# Altium PCB pci_104.PcbDoc (part 1 of 4)
Units mil, origin at the board's own origin, x right, y up, seen from the top; angles counter-clockwise.
Board outline 3775.2 x 3550 mil, 4 copper layers (Top Layer - RF, MidLayer2 - GND, MidLayer3 - POWER, Bottom Layer - Digital), stack 61.756 mil thick; 251 components, 242 nets, 872 pads, 382 vias.
Unrouted connection lines stored in the file: 291.
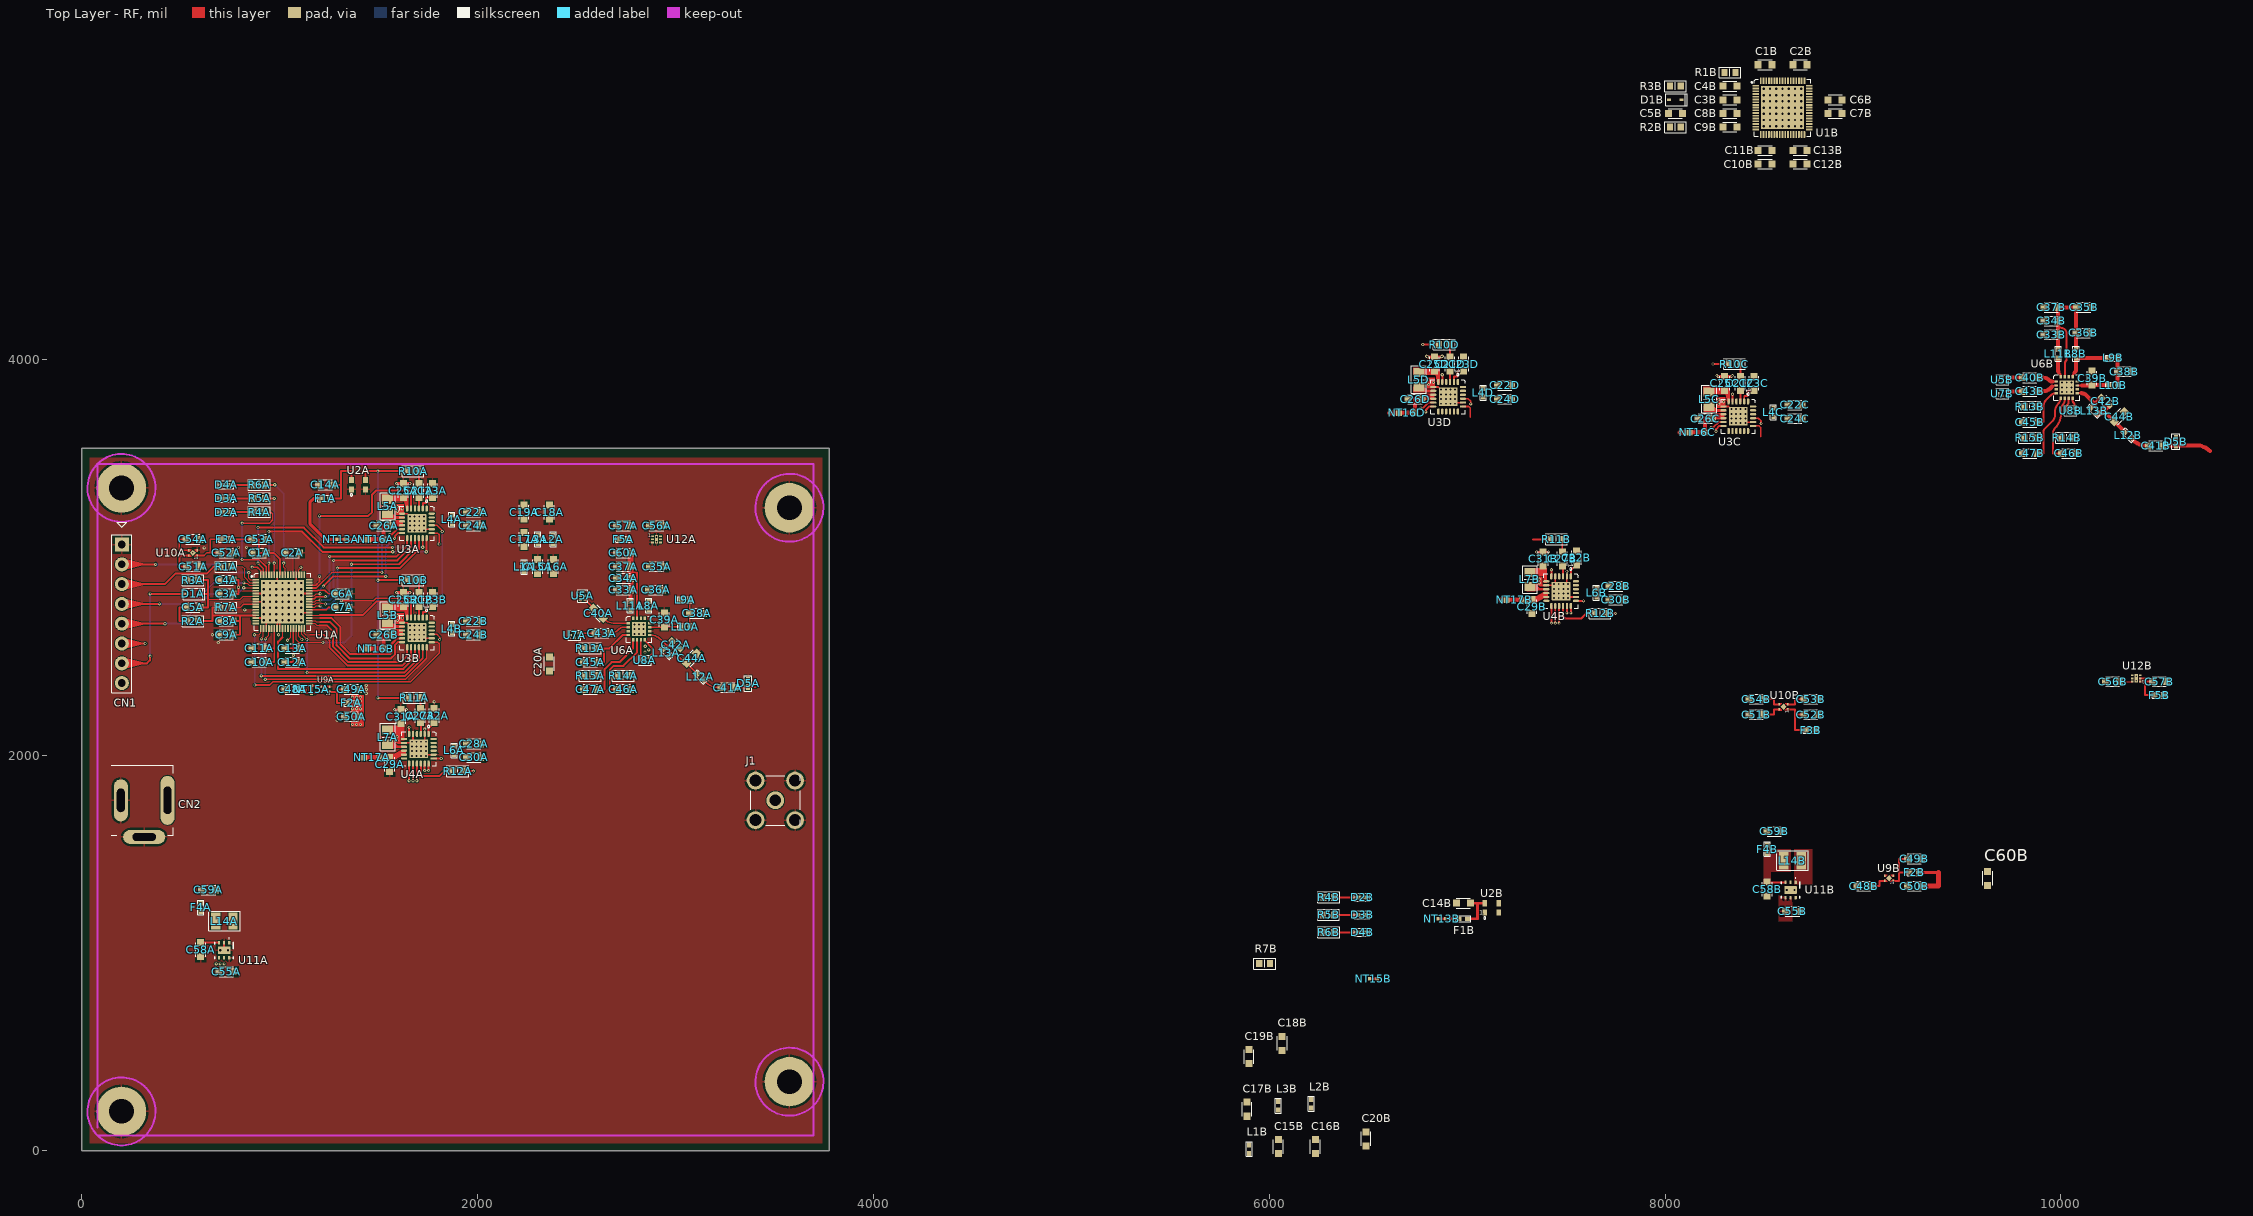
[diagram p0: Top Layer - RF view]
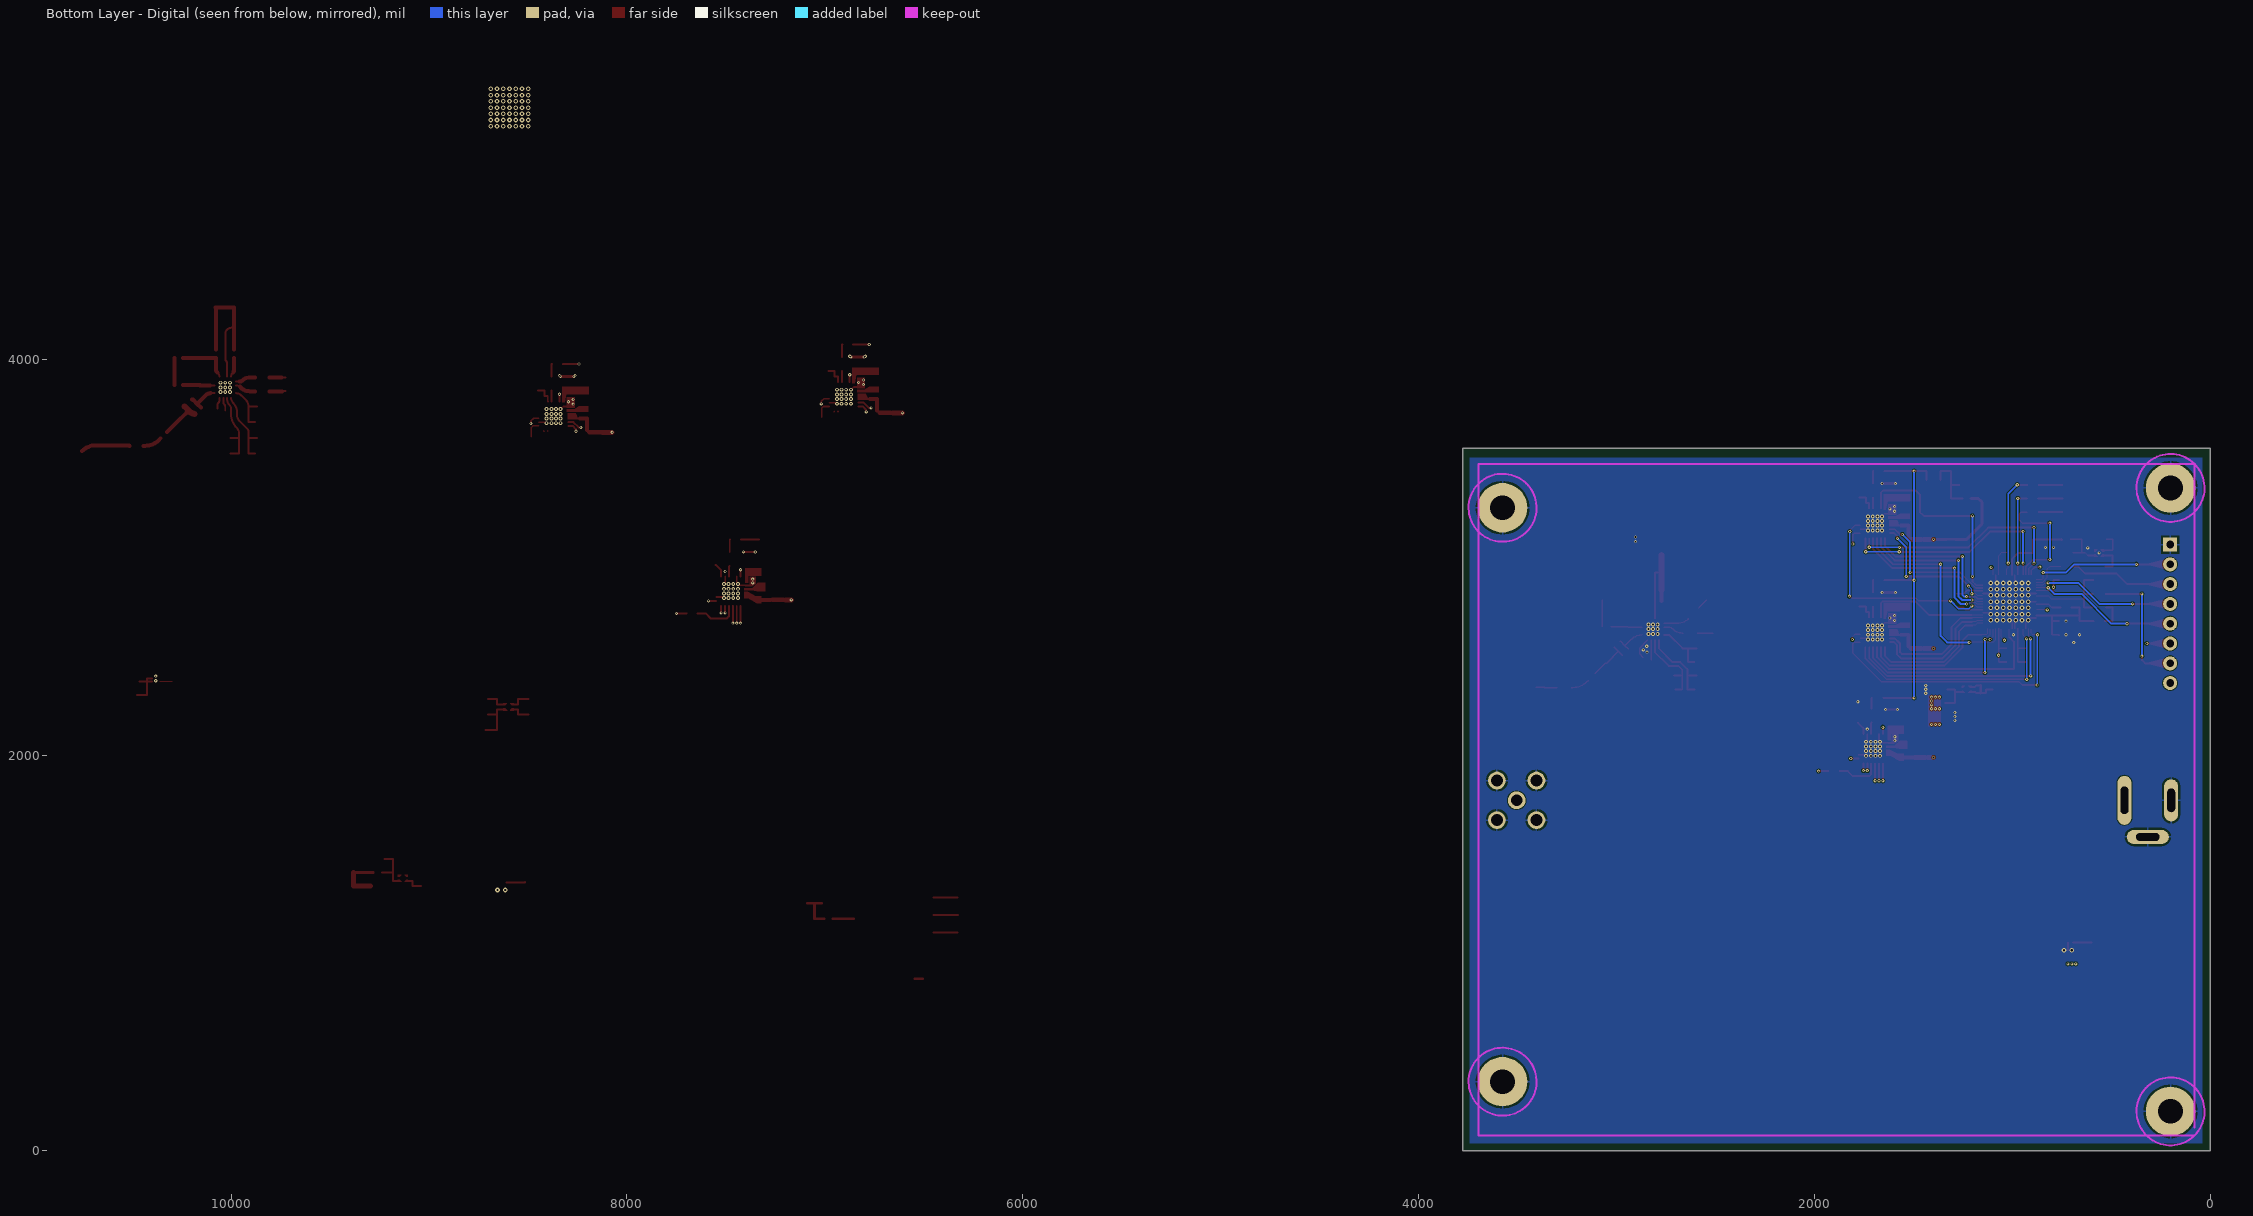
[diagram p1: Bottom Layer - Digital view, seen from below]
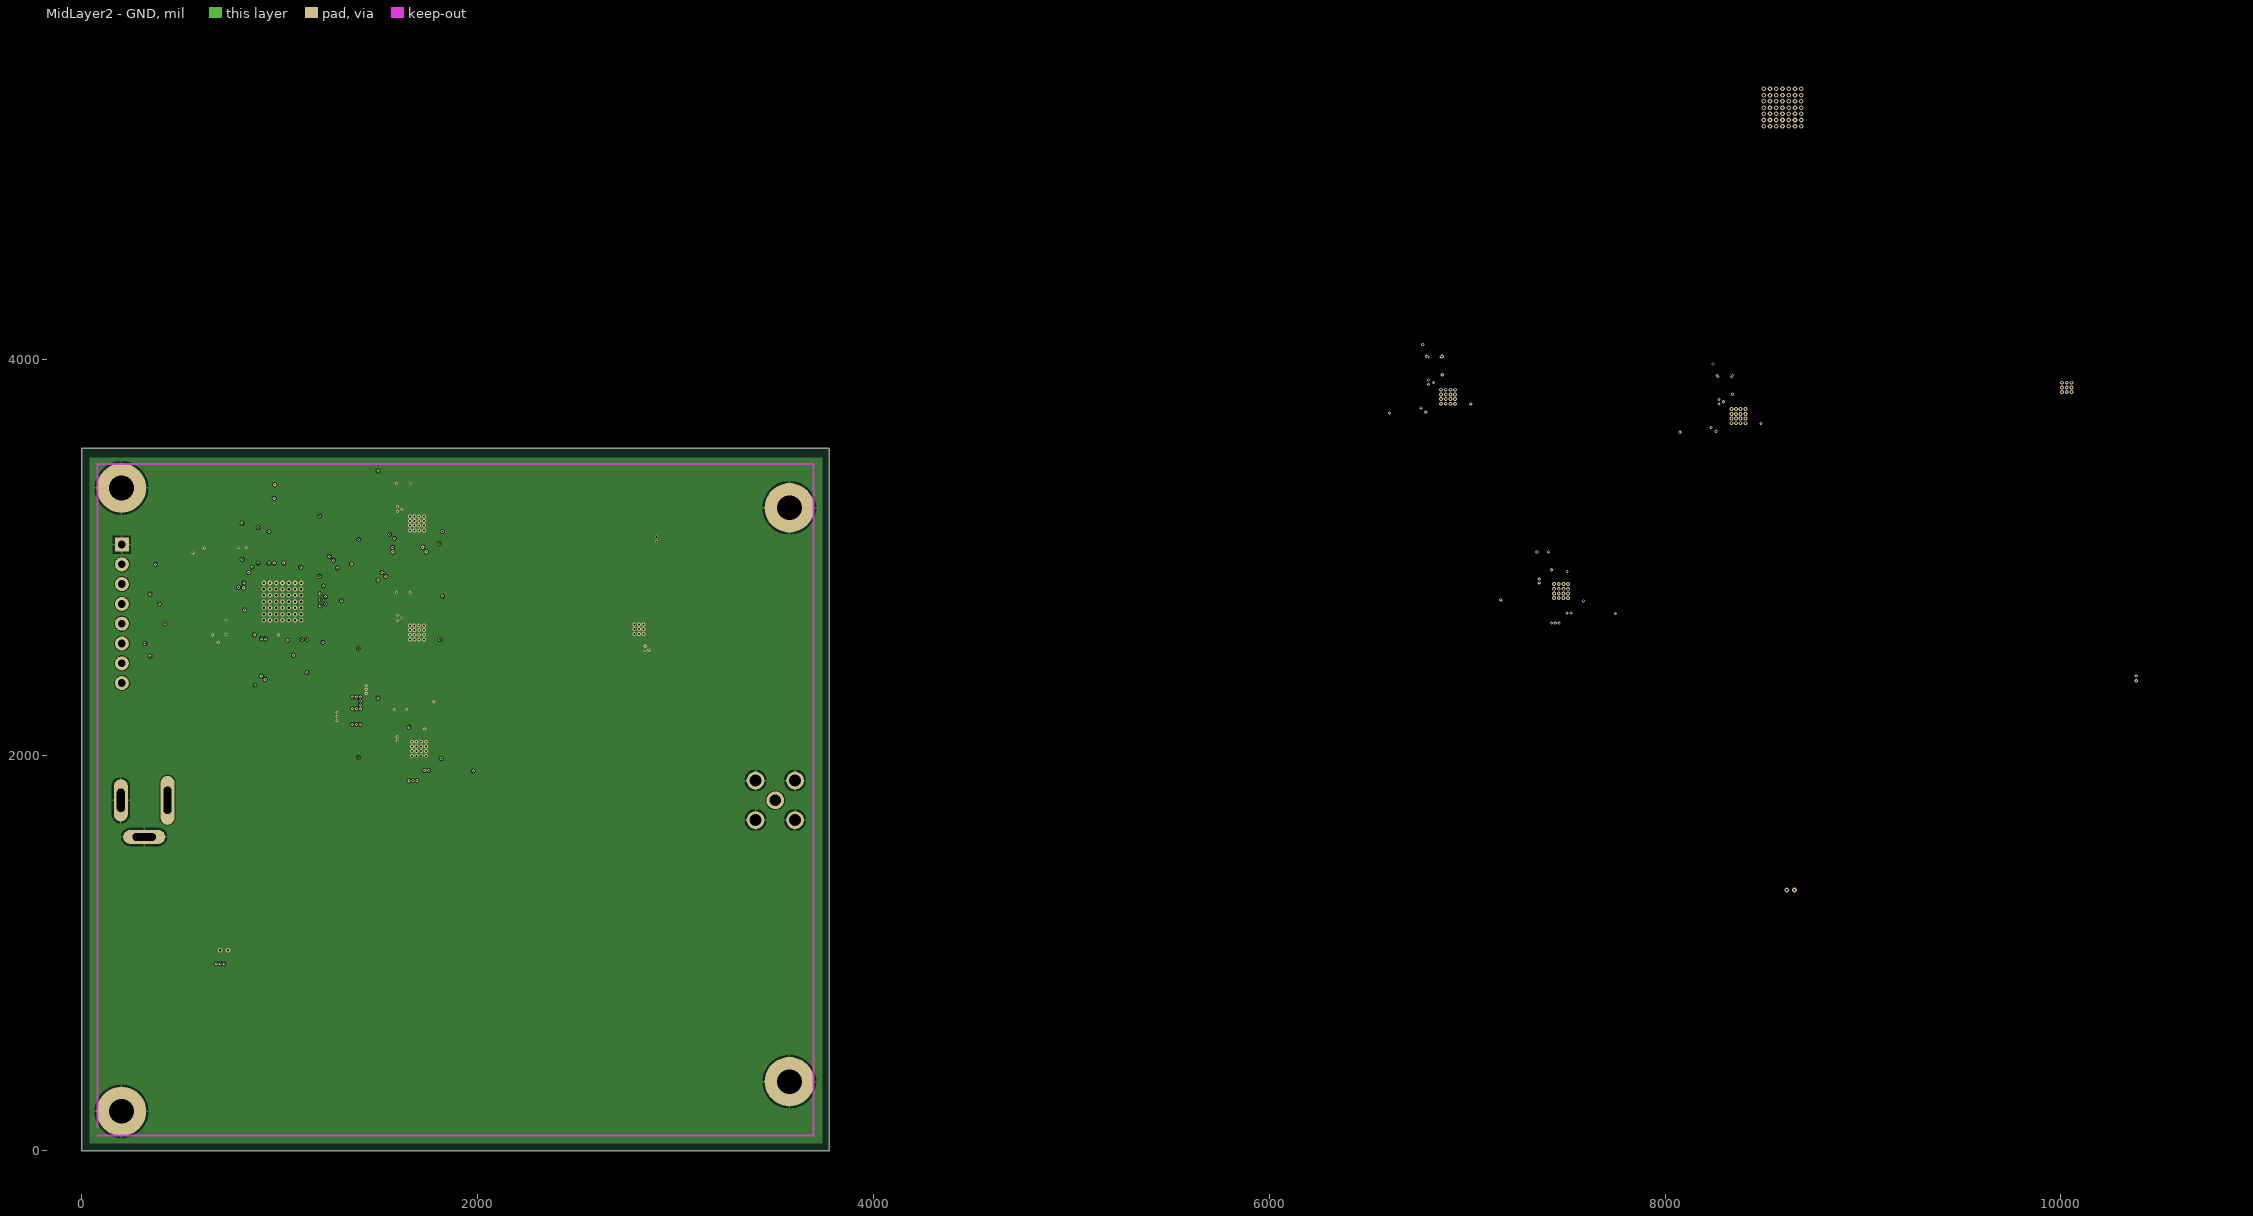
[diagram p2: MidLayer2 - GND]
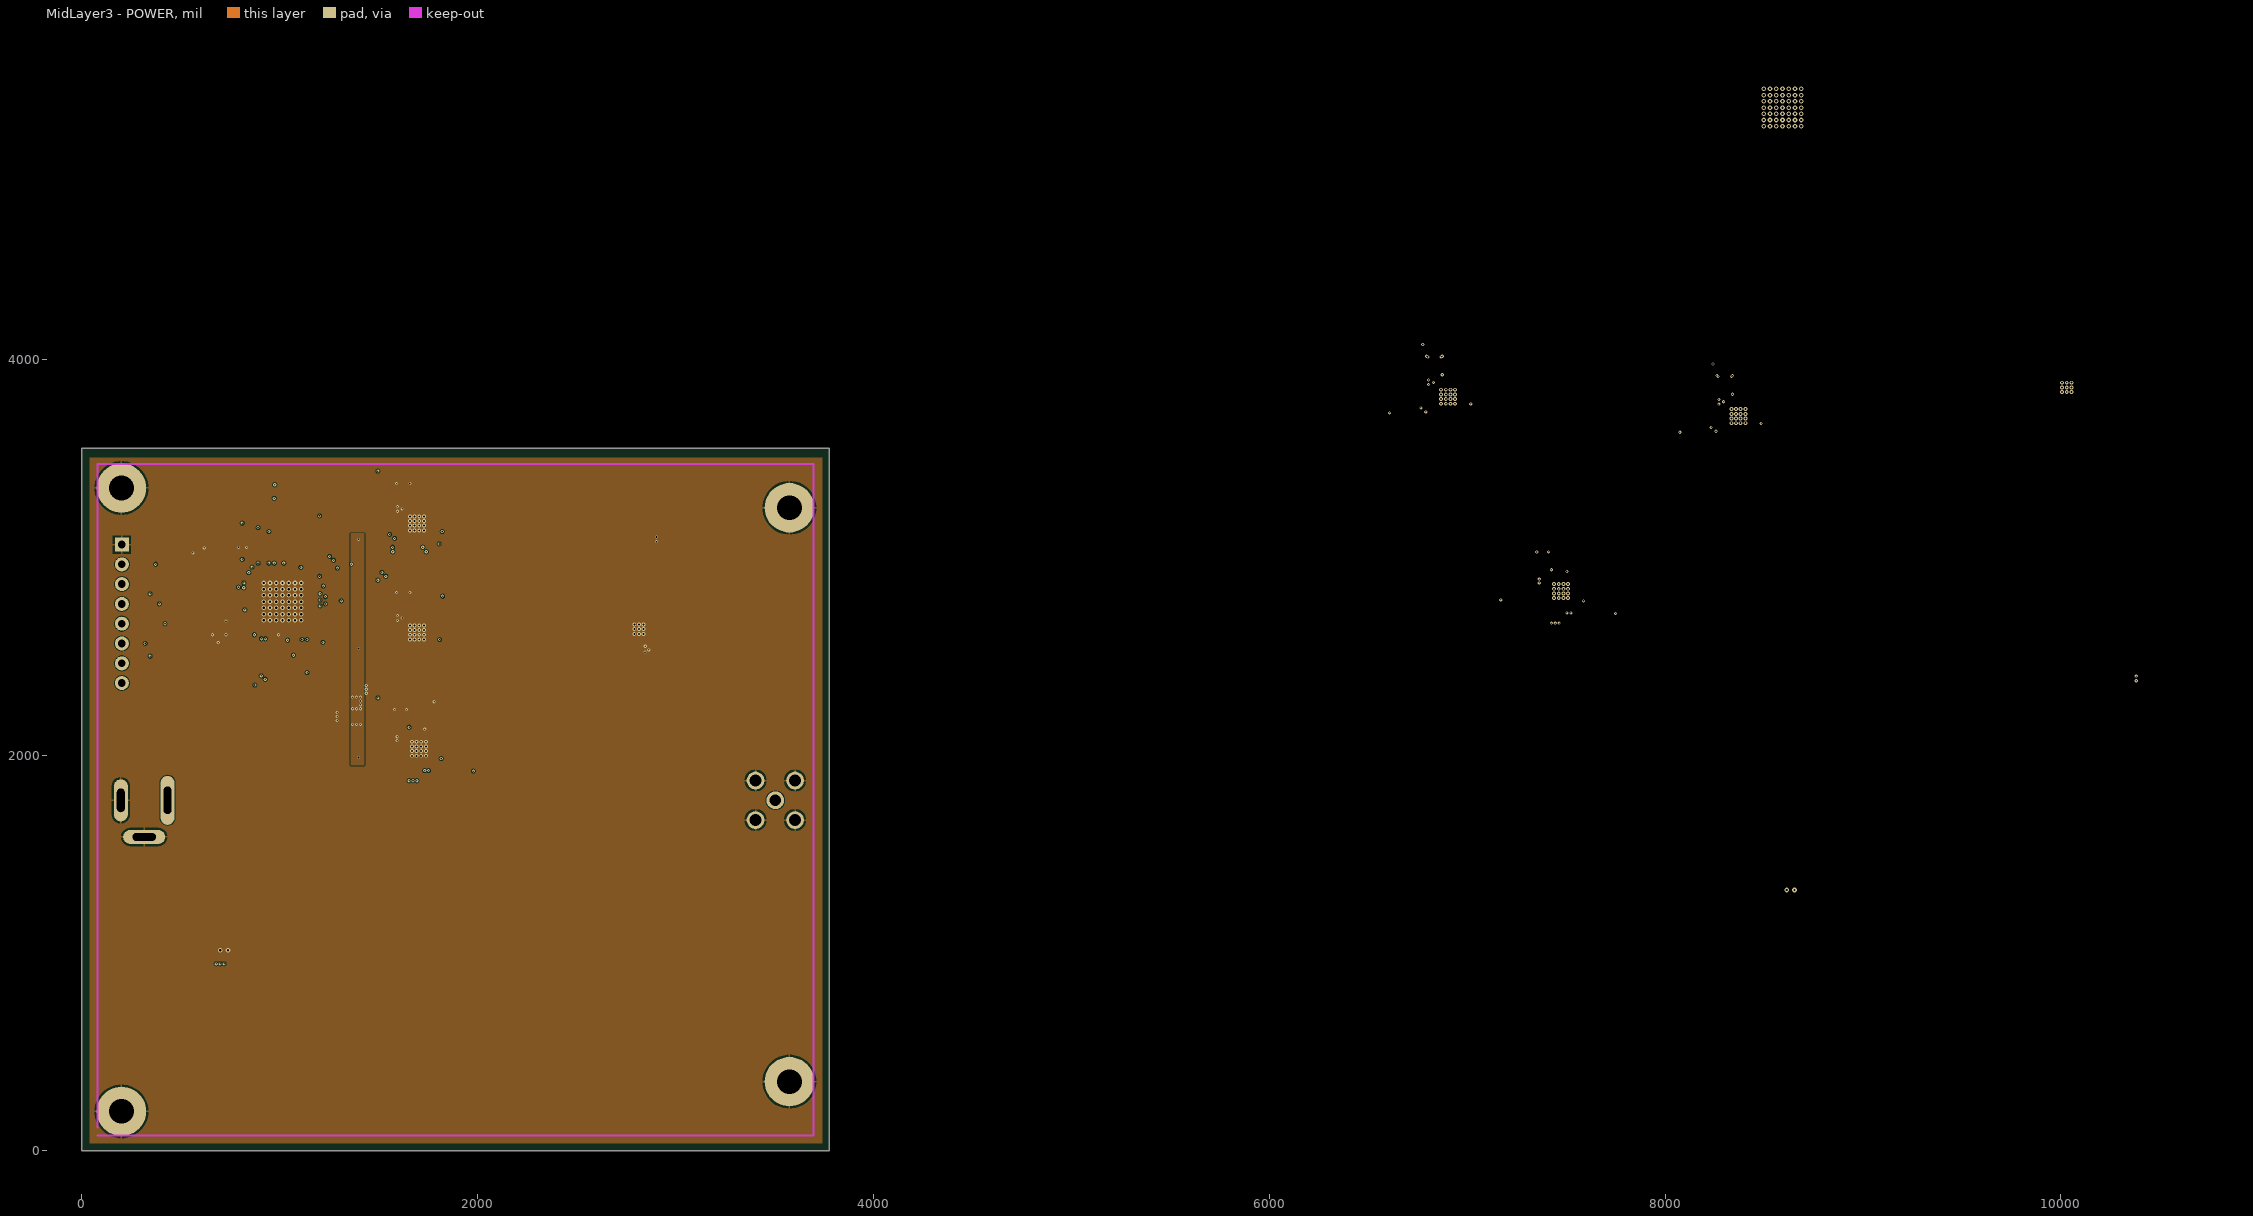
[diagram p3: MidLayer3 - POWER]

## Layer stack, top to bottom
Top Solder: solder mask 0.4, Solder Resist, Dk 3.5
Top Layer - RF: signal copper 1.378
Dielectric 1: core 4.5, Core-012, Dk 4.29
MidLayer2 - GND: signal copper 1.378
Center Dielectric: core 47.244, FR-4, Dk 4.3
MidLayer3 - POWER: signal copper 1.378
Dielectric 4: core 4.5, Core-012, Dk 4.29
Bottom Layer - Digital: signal copper 1.378
Bottom Solder: solder mask 0.4, Solder Resist, Dk 3.5

## Board outline
0,0 0,3550 3775.2,3550 3775.2,0

## Design rules (kind name [scope] priority, off if disabled: settings)
Clearance [All] p1: gap=4 ignorepadtopadclearanceinfootprint=FALSE except(0: Arc-Hole Track-Hole SMDPad-Hole THPad-Hole Via-Hole Fill-Hole Poly-Hole Region-Hole Text-Hole)
DiffPairsRouting [All] p1: maxlimit=10 minlimit=10 mostfreqgap=10 toplayer_minwidth=15 toplayer_maxwidth=15 toplayer_prefwidth=15 midlayer2_minwidth=15 midlayer2_maxwidth=15 midlayer2_prefwidth=15 midlayer3_minwidth=15 midlayer3_maxwidth=15 midlayer3_prefwidth=15 bottomlayer_minwidth=15 bottomlayer_maxwidth=15 bottomlayer_prefwidth=15 maxuncoupledlength=500
HoleSize [All] p1: absolutevalues=TRUE maxlimit=236.22 minlimit=11.81 maxpercent=80.000 minpercent=20.000
PlaneConnect PlaneConnect_1 [All] p1: planeconnectstyle=Relief reliefexpansion=20 reliefentries=4 reliefconductorwidth=10 reliefairgap=10
PolygonConnect "Schematic Polygon Connect Style" [InNetClass('DirectConnectPolygon')] p1: connectstyle=Direct reliefconductorwidth=10 reliefentries=4 polygonreliefangle="45 Angle" airgapwidth=10
PolygonConnect "GND/POWER Vias" [InNet('GND') OR InNet('VCC12A') OR InNet('VCC12A') OR InNet('VDD_RADIOA') OR InNet('VDD_RADIOB')] p2: thpad.connectstyle=Relief thpad.reliefconductorwidth=10 thpad.reliefentries=4 thpad.polygonreliefangle="90 Angle" thpad.airgapwidth=10 smdpad.connectstyle=Relief smdpad.reliefconductorwidth=10 smdpad.reliefentries=4 smdpad.polygonreliefangle="90 Angle" smdpad.airgapwidth=10 via.connectstyle=Direct via.reliefconductorwidth=10 via.reliefentries=4 via.polygonreliefangle="90 Angle" via.airgapwidth=10
PolygonConnect PowerDirectVias [InNet('VCC12A') AND InNet('VCC12B')] p3: thpad.connectstyle=Direct thpad.reliefconductorwidth=10 thpad.reliefentries=4 thpad.polygonreliefangle="90 Angle" thpad.airgapwidth=10 smdpad.connectstyle=Relief smdpad.reliefconductorwidth=10 smdpad.reliefentries=4 smdpad.polygonreliefangle="90 Angle" smdpad.airgapwidth=10 via.connectstyle=Direct via.reliefconductorwidth=10 via.reliefentries=4 via.polygonreliefangle="90 Angle" via.airgapwidth=10
PolygonConnect DirectSW1v2 [(InNet('SWA') OR InNet('SWB')  OR InNet('SX126x_CSNA')  OR InNet('SX126x_CSNB')  OR InNet('NetL14A_1')  OR InNet('NetL14B_1'))] p4: connectstyle=Direct reliefconductorwidth=10 reliefentries=4 polygonreliefangle="90 Angle" airgapwidth=10
PolygonConnect [All] p5: connectstyle=Relief reliefconductorwidth=10 reliefentries=4 polygonreliefangle="90 Angle" airgapwidth=10
RoomDefinition Principal [InComponentClass('Principal')] p1: confinementstyle=ConfineIn formatcopy=TRUE lockcomponents=FALSE outline 1564.96,189.09 2637.8,189.09 2637.8,3435.04 1564.96,3435.04
RoomDefinition PrincipalA.RADIOBB [InComponentClass('PrincipalA.RADIOBB')] p2: confinementstyle=ConfineIn formatcopy=TRUE lockcomponents=FALSE outline 1377.95,2933.07 1377.95,2470.47 2066.93,2470.47 2066.93,2933.07
RoomDefinition RedundadoB.RADIOAC [InComponentClass('RedundadoB.RADIOAC')] p3: confinementstyle=ConfineIn formatcopy=TRUE lockcomponents=FALSE outline 8055.12,4025.59 8055.12,3562.99 8744.09,3562.99 8744.09,4025.59
RoomDefinition RedundadoB.RADIOBD [InComponentClass('RedundadoB.RADIOBD')] p4: confinementstyle=ConfineIn formatcopy=TRUE lockcomponents=FALSE outline 6588.58,4124.02 6588.58,3661.42 7277.56,3661.42 7277.56,4124.02
RoomDefinition PrincipalA.RADIOCA [InComponentClass('PrincipalA.RADIOCA')] p5: confinementstyle=ConfineIn formatcopy=TRUE lockcomponents=FALSE outline 1377.95,1845.15 2066.93,1845.15 2066.93,2326.77 1377.95,2326.77
RoomDefinition PrincipalA.FrontEndA [InComponentClass('PrincipalA.FrontEndA')] p6: confinementstyle=ConfineIn formatcopy=TRUE lockcomponents=FALSE outline 2450.79,2244.09 3553.15,2244.09 3553.15,3080.71 2450.79,3080.71
RoomDefinition PrincipalA.PowerA [InComponentClass('PrincipalA.PowerA')] p7: confinementstyle=ConfineIn formatcopy=TRUE lockcomponents=FALSE outline 403.54,2608.27 3435.04,2608.27 3435.04,3405.51 403.54,3405.51
RoomDefinition PrincipalA.RADIOAA [InComponentClass('PrincipalA.RADIOAA')] p8: confinementstyle=ConfineIn formatcopy=TRUE lockcomponents=FALSE outline 1377.95,3484.25 1377.95,3021.65 2066.93,3021.65 2066.93,3484.25
RoomDefinition Redundado [InComponentClass('Redundado')] p9: confinementstyle=ConfineIn formatcopy=TRUE lockcomponents=FALSE outline 5838.58,-157.48 7216.54,-157.48 7216.54,1555.12 5838.58,1555.12
RoomDefinition PrincipalA.SX1302A [InComponentClass('PrincipalA.SX1302A')] p10: confinementstyle=ConfineIn formatcopy=TRUE lockcomponents=FALSE outline 364.17,2431.1 1407.48,2431.1 1407.48,3129.92 364.17,3129.92
RoomDefinition RedundadoB.SX1302B [InComponentClass('RedundadoB.SX1302B')] p11: confinementstyle=ConfineIn formatcopy=TRUE lockcomponents=FALSE outline 7865.06,4957 9056,4957 9056,5586.92 7865.06,5586.92
RoomDefinition RedundadoB.RADIOCB [InComponentClass('RedundadoB.RADIOCB')] p12: confinementstyle=ConfineIn formatcopy=TRUE lockcomponents=FALSE outline 7149.61,2641.73 7838.58,2641.73 7838.58,3149.61 7149.61,3149.61
RoomDefinition RedundadoB.PowerB [InComponentClass('RedundadoB.PowerB')] p13: confinementstyle=ConfineIn formatcopy=TRUE lockcomponents=FALSE outline 8387.8,1131.89 10582.68,1131.89 10582.68,2470.47 8387.8,2470.47
RoomDefinition RedundadoB.FrontEndB [InComponentClass('RedundadoB.FrontEndB')] p14: confinementstyle=ConfineIn formatcopy=TRUE lockcomponents=FALSE outline 9665.35,3465.75 10767.72,3465.75 10767.72,4302.37 9665.35,4302.37
RoutingVias [All] p1: holewidth=30 width=60 viastyle="Through Hole" minholewidth=7.87 minwidth=15.75 maxholewidth=30 maxwidth=60
SolderMaskExpansion [All] p1: expansion=4 istentingtop=FALSE
Width RF [InNetClass('RF')] p1: maxlimit=7.57 minlimit=5.27 preferedwidth=7.57 toplayer_minwidth=7.57 midlayer2_maxwidth=5.27 midlayer2_prefwidth=5.27 midlayer3_maxwidth=5.27 midlayer3_prefwidth=5.27 bottomlayer_minwidth=7.57 impedanceprofiledriven=TRUE impedanceprofileid={49D35EEA-AB47-4461-B96E-5E1FAEFAB518} impedanceprofilevalue=50.000000 minimp=50.000000 maximp=50.000000 favimp=50.000000 // RF 50R
Width [All] p2: maxlimit=100 minlimit=6 preferedwidth=10 midlayer2_maxwidth=10 midlayer3_maxwidth=10 minimp=50.000000 maximp=50.000000 favimp=50.000000
27 further rules are at their usual default settings.

## Classes and differential pairs
net class RF: NetC17A_1 NetC17A_2 NetC17B_1 NetC17B_2 NetC20A_1 NetC20B_1 NetC38A_1 NetC38B_1 NetC39A_1 NetC39B_1 NetC40A_1 NetC40A_2 NetC40B_1 NetC40B_2 NetC41A_2 NetC41B_2 NetC42A_1 NetC42A_2 NetC42B_1 NetC42B_2 NetC43A_1 NetC43A_2 NetC43B_1 NetC43B_2 NetJ1_1 NetL8A_2 NetL8B_2 NetL11A_2 NetL11B_2 NetU6A_7 NetU6A_8 NetU6B_7 NetU6B_8 RFO_RADIOAA RFO_RADIOAB SYS_RFIA SYS_RFIB SYS_RFOA SYS_RFOB VR_PAA VR_PAC
net class DirectConnectPolygon: NetC31A_1 NetC31B_1
channel class SX1302: PrincipalA.SX1302A RedundadoB.SX1302B
channel class SX1250: PrincipalA.RADIOAA PrincipalA.RADIOBB RedundadoB.RADIOAC RedundadoB.RADIOBD
channel class SX126x: PrincipalA.RADIOCA RedundadoB.RADIOCB
channel class Power: PrincipalA.PowerA RedundadoB.PowerB
channel class Gateway: Principal Redundado
channel class FrontEnd: PrincipalA.FrontEndA RedundadoB.FrontEndB
component class System: J1
component class Redundado: C14B C15B C16B C17B C18B C19B C20B D2B D3B D4B F1B L1B L2B L3B NT13B NT15B R4B R5B R6B R7B U2B
component class RedundadoB.SX1302B: C1B C2B C3B C4B C5B C6B C7B C8B C9B C10B C11B C12B C13B D1B R1B R2B R3B U1B
component class RedundadoB.RADIOCB: C27B C28B C29B C30B C31B C32B L6B L7B NT17B R11B R12B U4B
component class RedundadoB.RADIOBD: C21D C22D C23D C24D C25D C26D L4D L5D NT16D R10D U3D
component class RedundadoB.RADIOAC: C21C C22C C23C C24C C25C C26C L4C L5C NT16C R10C U3C
component class RedundadoB.PowerB: C48B C49B C50B C51B C52B C53B C54B C55B C56B C57B C58B C59B C60B F2B F3B F4B F5B L14B U9B U10B U11B U12B
component class RedundadoB.FrontEndB: C33B C34B C35B C36B C37B C38B C39B C40B C41B C42B C43B C44B C45B C46B C47B D5B L8B L9B L10B L11B L12B L13B R13B R14B R15B U5B U6B U7B U8B
component class Principal: C14A C15A C16A C17A C18A C19A C20A D2A D3A D4A F1A L1A L2A L3A NT13A NT15A R4A R5A R6A R7A U2A
component class PrincipalA.SX1302A: C1A C2A C3A C4A C5A C6A C7A C8A C9A C10A C11A C12A C13A D1A R1A R2A R3A U1A
component class PrincipalA.RADIOCA: C28A C29A C30A C31A C32A L6A L7A NT17A R12A U4A
component class PrincipalA.RADIOBB: C21B C22B C23B C24B C25B C26B L4B L5B NT16B R10B U3B
component class PrincipalA.RADIOAA: C21A C22A C23A C24A C25A C26A L4A L5A NT16A R10A U3A
component class PrincipalA.PowerA: C48A C49A C50A C51A C52A C53A C54A C55A C56A C57A C58A C59A C60A F2A F3A F4A F5A L14A U9A U10A U11A U12A
component class PrincipalA.FrontEndA: C33A C34A C35A C36A C37A C38A C39A C40A C41A C42A C43A C44A C45A C46A C47A D5A L8A L9A L10A L11A L12A L13A R13A R14A R15A U5A U6A U7A U8A
component class Connector: CN1 CN2
differential pair SX126x_RFIB: +SX126x_RFIB_P -SX126x_RFIB_N
differential pair SX126x_RFIA: +SX126x_RFIA_P -SX126x_RFIA_N
differential pair RFID: +RFID_P -RFID_N
differential pair RFIC: +RFIC_P -RFIC_N
differential pair RFIB: +RFIB_P -RFIB_N
differential pair RFIA: +RFIA_P -RFIA_N

## Components (designator, comment, footprint, x,y, rotation, side; value= is the part's Value field where it differs from the comment)
C1A "100nF X8R" C_0603 895.67,3021.65 r0 top (schematic designator C1)
C1B "100nF X8R" C_0603 8504.82,5488.5 r0 top (schematic designator C1)
C2A "100nF X8R" C_0603 1062.99,3021.65 r180 top (schematic designator C2)
C2B "100nF X8R" C_0603 8681.98,5488.5 r180 top (schematic designator C2)
C3A "1uF X8R" C_0603 728.35,2814.96 r0 top (schematic designator C3)
C3B "1uF X8R" C_0603 8327.65,5311.33 r0 top (schematic designator C3)
C4A "100nF X8R" C_0603 728.35,2883.86 r0 top (schematic designator C4)
C4B "100nF X8R" C_0603 8327.65,5380.23 r0 top (schematic designator C4)
C5A "100nF X8R" C_0603 561.02,2746.06 r180 top (schematic designator C5)
C5B "100nF X8R" C_0603 8052.06,5242.43 r180 top (schematic designator C5)
C6A "100nF X8R" C_0603 1314.96,2814.96 r180 top (schematic designator C6)
C6B "100nF X8R" C_0603 8859.15,5311.33 r180 top (schematic designator C6)
C7A "100nF X8R" C_0603 1314.96,2746.06 r180 top (schematic designator C7)
C7B "100nF X8R" C_0603 8859.15,5242.43 r180 top (schematic designator C7)
C8A "1uF X8R" C_0603 728.35,2677.17 r0 top (schematic designator C8)
C8B "1uF X8R" C_0603 8327.65,5242.43 r0 top (schematic designator C8)
C9A "100nF X8R" C_0603 728.35,2608.27 r0 top (schematic designator C9)
C9B "100nF X8R" C_0603 8327.65,5173.54 r0 top (schematic designator C9)
C10A "1uF X8R" C_0603 895.67,2470.47 r0 top (schematic designator C10)
C10B "1uF X8R" C_0603 8504.82,4986.53 r0 top (schematic designator C10)
C11A "100nF X8R" C_0603 895.67,2539.37 r0 top (schematic designator C11)
C11B "100nF X8R" C_0603 8504.82,5055.43 r0 top (schematic designator C11)
C12A "1uF X8R" C_0603 1062.99,2470.47 r180 top (schematic designator C12)
C12B "1uF X8R" C_0603 8681.98,4986.53 r180 top (schematic designator C12)
C13A "100nF X8R" C_0603 1062.99,2539.37 r180 top (schematic designator C13)
C13B "100nF X8R" C_0603 8681.98,5055.43 r180 top (schematic designator C13)
C14A "100nF X8R" C_0603 1230.32,3366.14 r180 top (schematic designator C14)
C14B "100nF X8R" C_0603 6980.32,1251.97 r180 top (schematic designator C14)
C15A "47nF X8R" C_0603 2303.15,2952.76 r90 top (schematic designator C15)
C15B "47nF X8R" C_0603 6045.28,21.65 r90 top (schematic designator C15)
C16A "47pF C0G" C_0603 2381.89,2952.76 r90 top (schematic designator C16)
C16B "47pF C0G" C_0603 6232.28,21.65 r90 top (schematic designator C16)
C17A "39pF C0G" C_0603 2234.25,3090.55 r90 top (schematic designator C17)
C17B "39pF C0G" C_0603 5887.8,210.74 r90 top (schematic designator C17)
C18A "GRM0335C1H100FA01" C_0603 2362.2,3228.35 r90 top (schematic designator C18)
C18B "GRM0335C1H100FA01" C_0603 6064.96,543.31 r90 top (schematic designator C18)
C19A "GRM0335C1H2R7WA01D" C_0603 2234.25,3228.35 r90 top (schematic designator C19)
C19B "GRM0335C1H2R7WA01D" C_0603 5897.64,476.49 r90 top (schematic designator C19)
C20A "GJM0335C1H2R1BB01" C_0603 2362.2,2460.63 r90 top (schematic designator C20)
C20B "GJM0335C1H2R1BB01" C_0603 6488.19,61.02 r90 top (schematic designator C20)
C21A "10pF X8R" C_0603 1702.76,3336.61 r90 top (schematic designator C21)
C21B "10pF X8R" C_0603 1702.76,2785.43 r90 top (schematic designator C21)
C21C "10pF X8R" C_0603 8379.92,3877.95 r90 top (schematic designator C21)
C21D "10pF X8R" C_0603 6913.39,3976.38 r90 top (schematic designator C21)
C22A "GJM0335C1H3R6WB01" C_0603 1978.35,3228.35 r0 top (schematic designator C22)
C22B "GJM0335C1H3R6WB01" C_0603 1978.35,2677.17 r0 top (schematic designator C22)
C22C "GJM0335C1H3R6WB01" C_0603 8655.51,3769.69 r0 top (schematic designator C22)
C22D "GJM0335C1H3R6WB01" C_0603 7188.98,3868.11 r0 top (schematic designator C22)
C23A "1uF X8R" C_0603 1771.65,3336.61 r90 top (schematic designator C23)
C23B "1uF X8R" C_0603 1771.65,2785.43 r90 top (schematic designator C23)
C23C "1uF X8R" C_0603 8448.82,3877.95 r90 top (schematic designator C23)
C23D "1uF X8R" C_0603 6982.28,3976.38 r90 top (schematic designator C23)
C24A "GJM0335C1H3R6WB01" C_0603 1978.35,3159.45 r0 top (schematic designator C24)
C24B "GJM0335C1H3R6WB01" C_0603 1978.35,2608.27 r0 top (schematic designator C24)
C24C "GJM0335C1H3R6WB01" C_0603 8655.51,3700.79 r0 top (schematic designator C24)
C24D "GJM0335C1H3R6WB01" C_0603 7188.98,3799.21 r0 top (schematic designator C24)
C25A "470nF X8R" C_0603 1624.02,3336.61 r90 top (schematic designator C25)
C25B "470nF X8R" C_0603 1624.02,2785.43 r90 top (schematic designator C25)
C25C "470nF X8R" C_0603 8301.18,3877.95 r90 top (schematic designator C25)
C25D "470nF X8R" C_0603 6834.65,3976.38 r90 top (schematic designator C25)
C26A "100nF X8R" C_0603 1525.59,3159.45 r180 top (schematic designator C26)
C26B "100nF X8R" C_0603 1525.59,2608.27 r180 top (schematic designator C26)
C26C "100nF X8R" C_0603 8202.76,3700.79 r180 top (schematic designator C26)
C26D "100nF X8R" C_0603 6736.22,3799.21 r180 top (schematic designator C26)
C27A "10pF X8R" C_0603 1710,2200 r90 top (schematic designator C27)
C27B "10pF X8R" C_0603 7480.31,2992.13 r90 top (schematic designator C27)
C28A "GJM0335C1H2R4WB01" C_0603 1980,2057.09 r0 top (schematic designator C28)
C28B "GJM0335C1H2R4WB01" C_0603 7751.65,2853.66 r0 top (schematic designator C28)
C29A "1uF X8R" C_0603 1555.12,1953.42 r270 top (schematic designator C29)
C29B "1uF X8R" C_0603 7326.77,2750 r270 top (schematic designator C29)
C30A "GJM0335C1H1R8WB01" C_0603 1980,1988.19 r0 top (schematic designator C30)
C30B "GJM0335C1H1R8WB01" C_0603 7751.65,2784.77 r0 top (schematic designator C30)
C31A "470nF X8R" C_0603 1612.05,2194.64 r90 top (schematic designator C31)
C31B "470nF X8R" C_0603 7383.7,2991.22 r90 top (schematic designator C31)
C32A "100nF X8R" C_0603 1780,2200 r90 top (schematic designator C32)
C32B "100nF X8R" C_0603 7551.65,2996.58 r90 top (schematic designator C32)
C33A "4.7uF 16V X8R" C_0603 2736.22,2834.65 r180 top (schematic designator C33)
C33B "4.7uF 16V X8R" C_0603 9950.79,4125.2 r180 top (schematic designator C33)
C34A "10nF 25V X8R" C_0603 2736.22,2893.7 r180 top (schematic designator C34)
C34B "10nF 25V X8R" C_0603 9950.79,4194.1 r180 top (schematic designator C34)
C35A "1nF 100V X8R" C_0603 2903.54,2952.76 r0 top (schematic designator C35)
C35B "1nF 100V X8R" C_0603 10114.17,4263 r0 top (schematic designator C35)
C36A "GJM1555C1H330GB01" C_0603 2899.61,2834.65 r0 top (schematic designator C36)
C36B "GJM1555C1H330GB01" C_0603 10112.2,4133.07 r0 top (schematic designator C36)
C37A "GRM1555C2A121GE01" C_0603 2736.22,2952.76 r180 top (schematic designator C37)
C37B "GRM1555C2A121GE01" C_0603 9950.79,4263 r180 top (schematic designator C37)
C38A "GRM0335C1H100FA01" C_0603 3106.3,2716.54 r0 top (schematic designator C38)
C38B "GRM0335C1H100FA01" C_0603 10320.87,3938.19 r0 top (schematic designator C38)
C39A "GJM0335C1H2R4WB01" C_0603 2942.91,2683.07 r90 top (schematic designator C39)
C39B "GJM0335C1H2R4WB01" C_0603 10157.48,3904.73 r90 top (schematic designator C39)
C40A "56pF 50V C0G" C_0603 2608.27,2716.54 r315 top (schematic designator C40)
C40B "56pF 50V C0G" C_0603 9842.52,3907.48 r0 top (schematic designator C40)
C41A "GRM0335C1H560FA01" C_0603 3263.78,2341.33 r180 top (schematic designator C41)
C41B "GRM0335C1H560FA01" C_0603 10478.35,3562.99 r180 top (schematic designator C41)
C42A "GJM0335C1H2R1BB01" C_0402 3001.97,2557.87 r315 top (schematic designator C42)
C42B "GJM0335C1H2R1BB01" C_0402 10224.89,3787.88 r315 top (schematic designator C42)
C43A "56pF 50V C0G" C_0603 2627.95,2616.93 r0 top (schematic designator C43)
C43B "56pF 50V C0G" C_0603 9842.52,3838.58 r0 top (schematic designator C43)
C44A "GJM0335C1H1R8WB01" C_0603 3080.71,2488.97 r45 top (schematic designator C44)
C44B "GJM0335C1H1R8WB01" C_0603 10295.28,3710.63 r45 top (schematic designator C44)
C45A "56pF 50V C0G" C_0603 2568.9,2470.47 r180 top (schematic designator C45)
C45B "56pF 50V C0G" C_0603 9842.52,3682.29 r180 top (schematic designator C45)
C46A "56pF 50V C0G" C_0603 2736.22,2332.68 r0 top (schematic designator C46)
C46B "56pF 50V C0G" C_0603 10039.37,3524.81 r0 top (schematic designator C46)
C47A "56pF 50V C0G" C_0603 2568.9,2332.68 r180 top (schematic designator C47)
C47B "56pF 50V C0G" C_0603 9842.52,3524.81 r180 top (schematic designator C47)
C48A "10uF 10V X8R" C_0603 1062.99,2332.68 r180 top (schematic designator C48)
C48B "10uF 10V X8R" C_0603 9003.94,1338.58 r180 top (schematic designator C48)
C49A "4.7uF 16V X8R" C_0603 1362.2,2332.68 r0 top (schematic designator C49)
C49B "4.7uF 16V X8R" C_0603 9259.84,1476.38 r0 top (schematic designator C49)
C50A "100nF 16V X8R" C_0603 1362.2,2194.88 r180 top (schematic designator C50)
C50B "100nF 16V X8R" C_0603 9259.84,1338.58 r180 top (schematic designator C50)
C51A "1uF 10V X8R" C_0603 562.99,2952.76 r0 top (schematic designator C51)
C51B "1uF 10V X8R" C_0603 8460.63,2204.72 r180 top (schematic designator C51)
C52A "1uF 10V X8R" C_0603 728.35,3021.65 r0 top (schematic designator C52)
C52B "1uF 10V X8R" C_0603 8736.22,2204.72 r0 top (schematic designator C52)
C53A "100nF 16V X8R" C_0603 895.67,3090.55 r180 top (schematic designator C53)
C53B "100nF 16V X8R" C_0603 8736.22,2283.46 r0 top (schematic designator C53)
C54A "1uF 10V X8R" C_0603 561.02,3090.55 r180 top (schematic designator C54)
C54B "1uF 10V X8R" C_0603 8460.63,2283.46 r0 top (schematic designator C54)
C55A "4.7uF 16V X8R" C_0603 728.35,905.51 r0 top (schematic designator C55)
C55B "4.7uF 16V X8R" C_0603 8643.7,1210.63 r0 top (schematic designator C55)
C56A "1uF 10V X8R" C_0603 2903.54,3159.45 r180 top (schematic designator C56)
C56B "1uF 10V X8R" C_0603 10261.81,2372.05 r180 top (schematic designator C56)
C57A "4.7uF 16V X8R" C_0603 2736.22,3159.45 r180 top (schematic designator C57)
C57B "4.7uF 16V X8R" C_0603 10498.03,2372.05 r0 top (schematic designator C57)
C58A "10uF 16V X8R" C_0603 600.39,1017.72 r270 top (schematic designator C58)
C58B "10uF 16V X8R" C_0603 8515.75,1322.83 r270 top (schematic designator C58)
C59A "100nF 16V X8R" C_0603 639.76,1318.9 r0 top (schematic designator C59)
C59B "100nF 16V X8R" C_0603 8551.18,1614.17 r0 top (schematic designator C59)
C60A "100nF 16V X8R" C_0603 2736.22,3021.65 r180 top (schematic designator C60)
C60B "100nF 16V X8R" C_0603 9629.92,1376.97 r90 top (schematic designator C60)
CN1 "Generic 1x8 Connector" "Header_M_1x8_0.1\"" 201.85,2714.06 r270 top
CN2 "Barrel Power Connector" PJ002B 433.07,1771.65 r180 top value="CONN PWR JACK 2.5X5.5MM SOLDER"
D1A "BAT54XV2T1G" SOD-523 561.02,2814.96 r180 top value="DIODE SCHOTTKY 30V 200MA SOD523" (schematic designator D1)
D1B "BAT54XV2T1G" SOD-523 8052.06,5311.33 r180 top value="DIODE SCHOTTKY 30V 200MA SOD523" (schematic designator D1)
D2A "APHHS1005SURCK" D_0402 728.35,3228.35 r180 top value="LED RED CLEAR CHIP SMD" (schematic designator D2)
D2B "APHHS1005SURCK" D_0402 6468.5,1281.5 r0 top value="LED RED CLEAR CHIP SMD" (schematic designator D2)
D3A "APHHS1005SURCK" D_0402 728.35,3297.24 r180 top value="LED RED CLEAR CHIP SMD" (schematic designator D3)
D3B "APHHS1005SURCK" D_0402 6468.5,1192.91 r0 top value="LED RED CLEAR CHIP SMD" (schematic designator D3)
D4A "APHHS1005SURCK" D_0402 728.35,3366.14 r180 top value="LED RED CLEAR CHIP SMD" (schematic designator D4)
D4B "APHHS1005SURCK" D_0402 6468.5,1104.33 r0 top value="LED RED CLEAR CHIP SMD" (schematic designator D4)
D5A "LXES15AAA1-153" D_0402 3366.14,2362.2 r90 top value="LXES Series - ESD Protection Device - Ultra Low Capacitance" (schematic designator D5)
D5B "LXES15AAA1-153" D_0402 10580.71,3583.86 r90 top value="LXES Series - ESD Protection Device - Ultra Low Capacitance" (schematic designator D5)
F1A "BLM15PG100SN1D" L_0402 1230.32,3297.24 r0 top value="Ferrite bead 10 ohm 1A" (schematic designator F1)
F1B "BLM15PG100SN1D" L_0402 6980.32,1173.23 r0 top value="Ferrite bead 10 ohm 1A" (schematic designator F1)
F2A "BLM15PG100SN1D" L_0402 1362.2,2263.78 r0 top value="Ferrite bead 10 ohm 1A" (schematic designator F2)
F2B "BLM15PG100SN1D" L_0402 9259.84,1407.48 r0 top value="Ferrite bead 10 ohm 1A" (schematic designator F2)
F3A "BLM15PG100SN1D" L_0402 728.35,3090.55 r0 top value="Ferrite bead 10 ohm 1A" (schematic designator F3)
F3B "BLM15PG100SN1D" L_0402 8736.22,2125.98 r0 top value="Ferrite bead 10 ohm 1A" (schematic designator F3)
F4A "BLM15PG100SN1D" L_0402 600.39,1230.31 r90 top value="Ferrite bead 10 ohm 1A" (schematic designator F4)
F4B "BLM15PG100SN1D" L_0402 8515.75,1525.59 r90 top value="Ferrite bead 10 ohm 1A" (schematic designator F4)
F5A "BLM15PG100SN1D" L_0402 2736.22,3090.55 r180 top value="Ferrite bead 10 ohm 1A" (schematic designator F5)
F5B "BLM15PG100SN1D" L_0402 10498.03,2303.15 r0 top value="Ferrite bead 10 ohm 1A" (schematic designator F5)
J1 "SMA RF Connector" "SMA THT connector" 3503.94,1771.65 r0 top value="SMA female"
L1A "LQW15AN47NJ00D" L_0402 2234.25,2950.68 r90 top (schematic designator L1)
L1B "LQW15AN47NJ00D" L_0402 5897.64,9.73 r90 top (schematic designator L1)
L2A "LQW15AN2N5C00D" L_0402 2381.89,3090.55 r90 top (schematic designator L2)
L2B "LQW15AN2N5C00D" L_0402 6212.6,238.19 r90 top (schematic designator L2)
L3A "LQW15AN4N7C00" L_0402 2303.15,3090.55 r90 top (schematic designator L3)
L3B "LQW15AN4N7C00" L_0402 6045.28,228.35 r90 top (schematic designator L3)
L4A "LQW15AN12NH00D" L_0402 1870.08,3190.94 r270 top (schematic designator L4)
L4B "LQW15AN12NH00D" L_0402 1870.08,2639.76 r270 top (schematic designator L4)
L4C "LQW15AN12NH00D" L_0402 8547.24,3732.28 r270 top (schematic designator L4)
L4D "LQW15AN12NH00D" L_0402 7080.71,3830.71 r270 top (schematic designator L4)
L5A "MLZ2012M150W" 0805[2012] 1545.28,3257.87 r270 top value="FIXED IND 15UH 250MA 950MOHM SMD" (schematic designator L5)
L5B "MLZ2012M150W" 0805[2012] 1545.28,2706.69 r270 top value="FIXED IND 15UH 250MA 950MOHM SMD" (schematic designator L5)
L5C "MLZ2012M150W" 0805[2012] 8222.44,3799.21 r270 top value="FIXED IND 15UH 250MA 950MOHM SMD" (schematic designator L5)
L5D "MLZ2012M150W" 0805[2012] 6755.91,3897.64 r270 top value="FIXED IND 15UH 250MA 950MOHM SMD" (schematic designator L5)
L6A "LQW15AN15NH00D" L_0402 1881.89,2023.62 r270 top (schematic designator L6)
L6B "LQW15AN15NH00D" L_0402 7653.54,2820.2 r270 top (schematic designator L6)
L7A "MLZ2012M150W" 0805[2012] 1545.28,2091.22 r270 top value="FIXED IND 15UH 250MA 950MOHM SMD" (schematic designator L7)
L7B "MLZ2012M150W" 0805[2012] 7316.93,2887.8 r270 top value="FIXED IND 15UH 250MA 950MOHM SMD" (schematic designator L7)
L8A "LQW15AN6N8G80D" L_0402 2864.17,2755.91 r270 top (schematic designator L8)
L8B "LQW15AN6N8G80D" L_0402 10076.77,4028.63 r270 top (schematic designator L8)
L9A "LQG15WZ2N7C02D" L_0402 3049.1,2785.43 r0 top (schematic designator L9)
L9B "LQG15WZ2N7C02D" L_0402 10263.67,4007.09 r0 top (schematic designator L9)
L10A "LQW15AN7N5J00D" L_0402 3049.1,2647.64 r180 top (schematic designator L10)
L10B "LQW15AN7N5J00D" L_0402 10263.67,3869.3 r180 top (schematic designator L10)
L11A "LQP15MN1N2B02" L_0402 2771.65,2755.91 r270 top (schematic designator L11)
L11B "LQP15MN1N2B02" L_0402 9986.22,4028.63 r270 top (schematic designator L11)
L12A "LQW15AN4N7C00" L_0402 3125.63,2394.84 r315 top (schematic designator L12)
L12B "LQW15AN4N7C00" L_0402 10340.19,3616.5 r315 top (schematic designator L12)
L13A "LQG15HN3N3S02" L_0402 2952.76,2518.5 r315 top (schematic designator L13)
L13B "LQG15HN3N3S02" L_0402 10167.32,3740.16 r315 top (schematic designator L13)
L14A "LQM2HPN2R2MJ0L" L_1008 720.47,1161.42 r180 top value="FIXED IND 2.2UH 1A 150 MOHM" (schematic designator L14)
L14B "LQM2HPN2R2MJ0L" L_1008 8643.7,1466.54 r180 top value="FIXED IND 2.2UH 1A 150 MOHM" (schematic designator L14)
NT13A "NT" NTIE12 1309.06,3090.55 r0 top net-tie (schematic designator NT13)
NT13B "NT" NTIE12 6872.05,1173.23 r180 top net-tie (schematic designator NT13)
NT15A "NT" NTIE12 1159.68,2332.68 r90 top net-tie (schematic designator NT15)
NT15B "NT" NTIE12 6525.59,870.19 r0 top net-tie (schematic designator NT15)
NT16A "NT" NTIE24 1484.37,3090 r180 top net-tie (schematic designator NT16)
NT16B "NT" NTIE24 1484.37,2538.82 r180 top net-tie (schematic designator NT16)
NT16C "NT" NTIE24 8161.54,3631.34 r180 top net-tie (schematic designator NT16)
NT16D "NT" NTIE24 6695,3729.76 r180 top net-tie (schematic designator NT16)
NT17A "NT" NTIE24 1465.59,1988.19 r180 top net-tie (schematic designator NT17)
NT17B "NT" NTIE24 7237.24,2784.77 r180 top net-tie (schematic designator NT17)
R1A "100R 5% 1/20W" 0603[1608] 728.35,2952.76 r180 top (schematic designator R1)
R1B "100R 5% 1/20W" 0603[1608] 8327.65,5449.13 r180 top (schematic designator R1)
R2A "10R 5% 1/20W" 0603[1608] 561.02,2677.17 r0 top (schematic designator R2)
R2B "10R 5% 1/20W" 0603[1608] 8052.06,5173.54 r0 top (schematic designator R2)
R3A "47k 5% 1/20W" 0603[1608] 561.02,2883.86 r0 top (schematic designator R3)
R3B "47k 5% 1/20W" 0603[1608] 8052.06,5380.23 r0 top (schematic designator R3)
R4A "680R 10% 1/8W" 0603[1608] 895.67,3228.35 r0 top (schematic designator R4)
R4B "680R 10% 1/8W" 0603[1608] 6301.18,1281.5 r180 top (schematic designator R4)
R5A "680R 10% 1/8W" 0603[1608] 897.64,3297.24 r0 top (schematic designator R5)
R5B "680R 10% 1/8W" 0603[1608] 6299.21,1192.91 r180 top (schematic designator R5)
R6A "680R 10% 1/8W" 0603[1608] 895.67,3366.14 r0 top (schematic designator R6)
R6B "680R 10% 1/8W" 0603[1608] 6301.18,1104.33 r180 top (schematic designator R6)
R7A "47k 5% 1/20W" 0603[1608] 728.35,2746.06 r180 top (schematic designator R7)
R7B "47k 5% 1/20W" 0603[1608] 5976.38,946.85 r0 top (schematic designator R7)
R10A "220R 5% 1/20W" 0603[1608] 1673.23,3435.04 r0 top (schematic designator R10)
R10B "220R 5% 1/20W" 0603[1608] 1673.23,2883.86 r0 top (schematic designator R10)
R10C "220R 5% 1/20W" 0603[1608] 8350.39,3976.38 r0 top (schematic designator R10)
R10D "220R 5% 1/20W" 0603[1608] 6883.86,4074.8 r0 top (schematic designator R10)
R11A "220R 5% 1/20W" 0603[1608] 1680,2290 r0 top (schematic designator R11)
R11B "220R 5% 1/20W" 0603[1608] 7450.79,3090.55 r0 top (schematic designator R11)
R12A "100R 5% 1/20W" 0603[1608] 1899.61,1919.29 r180 top (schematic designator R12)
R12B "100R 5% 1/20W" 0603[1608] 7671.26,2715.87 r180 top (schematic designator R12)
R13A "1k 5% 1/20W" 0603[1608] 2568.9,2539.37 r180 top (schematic designator R13)
R13B "1k 5% 1/20W" 0603[1608] 9842.52,3761.03 r180 top (schematic designator R13)
R14A "1k 5% 1/20W" 0603[1608] 2736.22,2401.57 r0 top (schematic designator R14)
R14B "1k 5% 1/20W" 0603[1608] 10029.53,3603.55 r0 top (schematic designator R14)
R15A "1k 5% 1/20W" 0603[1608] 2568.9,2401.57 r180 top (schematic designator R15)
R15B "1k 5% 1/20W" 0603[1608] 9842.52,3603.55 r180 top (schematic designator R15)
U1A "SX1302IMLTRT" vqfn68_7x7mm 1013.78,2775.59 r0 top locked value=SX1302 (schematic designator U1)
U1B "SX1302IMLTRT" vqfn68_7x7mm 8593.4,5271.96 r0 top value=SX1302 (schematic designator U1)
U2A "32MHz Clipped Sinewave" "TCXO 2.0x1.6mm" 1397.64,3366.14 r0 top value="32MHz TCXO - Clipped Sinewave Output" (schematic designator U2)
U2B "32MHz Clipped Sinewave" "TCXO 2.0x1.6mm" 7124.02,1228.35 r0 top value="32MHz TCXO - Clipped Sinewave Output" (schematic designator U2)
U3A "SX1250" vqfn24_4x4mm 1692.91,3171.26 r270 top locked value="SUB-GHZ RF FRONT END TRANSCIEVER" (schematic designator U3)
U3B "SX1250" vqfn24_4x4mm 1692.91,2620.08 r270 top value="SUB-GHZ RF FRONT END TRANSCIEVER" (schematic designator U3)
U3C "SX1250" vqfn24_4x4mm 8370.08,3712.6 r270 top value="SUB-GHZ RF FRONT END TRANSCIEVER" (schematic designator U3)
U3D "SX1250" vqfn24_4x4mm 6903.54,3811.02 r270 top value="SUB-GHZ RF FRONT END TRANSCIEVER" (schematic designator U3)
U4A "SX1261/2" vqfn24_4x4mm 1702.76,2032.16 r270 top locked value="IC RF TXRX ISM<1GHZ 24VFQFN" (schematic designator U4)
U4B "SX1261/2" vqfn24_4x4mm 7474.41,2828.74 r270 top value="IC RF TXRX ISM<1GHZ 24VFQFN" (schematic designator U4)
U5A "SAW Filter RF360" QCS5P_1.4x1.1mm 2531.58,2805.12 r270 top value="915MHz Frequency General Purpose RF SAW Filter (Surface Acoustic Wave) 2.8dB 26MHz Bandwidth 5-SMD, No Lead" (schematic designator U5)
U5B "SAW Filter RF360" QCS5P_1.4x1.1mm 9704.72,3896.16 r0 top value="915MHz Frequency General Purpose RF SAW Filter (Surface Acoustic Wave) 2.8dB 26MHz Bandwidth 5-SMD, No Lead" (schematic designator U5)
U6A "SKY66423-11" SKY66420_16P_3x3mm 2814.96,2636.61 r0 top value="RF Front End 860MHz ~ 930MHz" (schematic designator U6)
U6B "SKY66423-11" SKY66420_16P_3x3mm 10029.53,3858.27 r0 top value="RF Front End 860MHz ~ 930MHz" (schematic designator U6)
U7A "SAW Filter RF360" QCS5P_1.4x1.1mm 2490.16,2605.61 r0 top value="915MHz Frequency General Purpose RF SAW Filter (Surface Acoustic Wave) 2.8dB 26MHz Bandwidth 5-SMD, No Lead" (schematic designator U7)
U7B "SAW Filter RF360" QCS5P_1.4x1.1mm 9704.72,3827.26 r0 top value="915MHz Frequency General Purpose RF SAW Filter (Surface Acoustic Wave) 2.8dB 26MHz Bandwidth 5-SMD, No Lead" (schematic designator U7)
U8A "SAW Filter RF360" QCS5P_1.4x1.1mm 2844.49,2480.32 r0 top value="915MHz Frequency General Purpose RF SAW Filter (Surface Acoustic Wave) 2.8dB 26MHz Bandwidth 5-SMD, No Lead" (schematic designator U8)
U8B "SAW Filter RF360" QCS5P_1.4x1.1mm 10049.21,3740.16 r0 top value="915MHz Frequency General Purpose RF SAW Filter (Surface Acoustic Wave) 2.8dB 26MHz Bandwidth 5-SMD, No Lead" (schematic designator U8)
U9A "LDO 3.3V" UDFN4_1x1mm 1230.31,2332.68 r90 top (schematic designator U9)
U9B "LDO 3.3V" UDFN4_1x1mm 9131.89,1377.95 r90 top (schematic designator U9)
U10A "LDO 3V3" UDFN4_1x1mm 561.02,3021.65 r90 top value="LDO 3V" (schematic designator U10)
U10B "LDO 3V3" UDFN4_1x1mm 8598.43,2244.09 r90 top value="LDO 3V" (schematic designator U10)
U11A "Switching Regulator 1.2V" WSON-6 718.5,1013.78 r270 top (schematic designator U11)
U11B "Switching Regulator 1.2V" WSON-6 8633.86,1318.9 r270 top (schematic designator U11)
U12A "LDO 3.3V" XDFN6_1.2X1.2mm 2903.54,3090.55 r0 top (schematic designator U12)
U12B "LDO 3.3V" XDFN6_1.2X1.2mm 10380.51,2387.8 r180 top (schematic designator U12)

## Footprints (in the part's own frame and the unit in brackets; to place one, negate y for a bottom-side part, rotate by r counter-clockwise, add the part's x,y. Pads: shape width x height; smd on the part's side, far side on the other; paste and mask are expansions set on the pad)
0603[1608] [mm] "Chip Capacitor, Body 1.6x0.8mm, IPC High Density"
  rect 0.8x0.9 smd: 1(-0.7,0) 2(0.7,0)
  silkscreen extent -1.4,-0.7 1.4,0.7, body extent -0.79,-0.4 0.81,0.4, height 0.45
0805[2012] [mm] "Chip Resistor, Body 2.0x1.2mm, IPC Medium Density"
  rect 1.2x1.4 smd: 1(-0.9,0) 2(0.9,0)
  silkscreen extent -1.75,-0.95 1.75,0.95, body extent -1,-0.63 1,0.62, height 0.5
C_0402 [mm] "Capacitor 0402"
  rect 0.9x0.7 smd: 1(-0.65,0) 2(0.65,0)
  silkscreen extent -0.55,-0.58 0.55,0.58, body extent -0.5,-0.25 0.5,0.25, height 0.5
C_0603 [mm] "Capacitor 0603"
  rect 0.9x0.9 smd: 1(-0.9,0) 2(0.9,0)
  silkscreen extent -0.9,-0.63 0.9,0.63, body extent -0.8,-0.4 0.8,0.4, height 0.9
D_0402 [mil]
  rect 30x20 smd paste+0 mask+0: 1(-18.5,0) 2(18.5,0)
  silkscreen extent -39,-20 39,20, body extent -19,-10 19,10, height 20
"Header_M_1x8_0.1\"" [mm] "Header Male 1 x 8 Vias Pitch 100mils"
  rect 1.8x1.8 hole 1: 1(-8.89,0)
  round 1.8 hole 1: 2(-6.35,0) 3(-3.81,0) 4(-1.27,0) 5(1.27,0) 6(3.81,0) 7(6.35,0) 8(8.89,0)
  silkscreen extent -11.75,-1.27 10.16,1.27, body extent -10.16,-1.27 10.16,1.27, height 9.2
L_0402 [mm]
  rect 0.656x0.55 smd paste+0 mask+0: 1(-0.553,0) 2(0.553,0)
  silkscreen extent -0.95,-0.4 0.95,0.38, body extent -0.53,-0.28 0.53,0.28, height 0.33
L_1008 [mil] "L_1008"
  rect 46x87 smd paste+0 mask+0: 1(-44,0) 2(44,0)
  silkscreen extent -79,-49 79,49, body extent -53,-44 53,44, height 39
NTIE12 [mil] "NTIE 12mil"
  rect 16x16 smd: 1(-19.68,0) 2(19.68,0)
  Top Layer - RF lines w12: -19.68,0 19.68,0
NTIE24 [mil] "NTIE 24 mil"
  rect 30x30 smd: 1(-39.37,0) 2(39.37,0)
  Top Layer - RF lines w24: 27.56,0 -27.56,0
PJ002B [mm]
  oval 1.8x6.3 hole 1 slot 3.5 at 90 deg: 1(0,0)
  oval 1.8x5.4 hole 1 slot 3 at 90 deg: 2(6,0)
  oval 5.4x1.8 hole 1 slot 3 at 0 deg: 3(3,4.7)
  silkscreen extent -0.7,-4.5 7.2,4.5, body extent -0.7,-4.7 13.7,4.7, height 11.05
QCS5P_1.4x1.1mm [mm] "QCS5P footprint, 1.4x1.1mm; TDK"
  rrect5% 0.3x0.375 smd paste+0 mask+0.05: 1(-0.5,0) 2(0,-0.288) 3(0.5,-0.288) 4(0.5,0.288) 5(0,0.288)
  silkscreen extent -0.8,-0.65 0.8,0.65, body extent -0.7,-0.55 0.7,0.55, height 1
SKY66420_16P_3x3mm [mm] "16 Leads, Body 3.0x3.0mm, Pitch 0.50mm"
  rrect5% 0.45x0.3 smd mask+0.05: 1(-1.375,0.75) 2(-1.375,0.25) 3(-1.375,-0.25) 4(-1.375,-0.75) 9(1.375,-0.75) 10(1.375,-0.25) 11(1.375,0.25) 12(1.375,0.75)
  rrect5% 0.3x0.45 smd mask+0.05: 5(-0.75,-1.375) 6(-0.25,-1.375) 7(0.25,-1.375) 8(0.75,-1.375) 13(0.75,1.375) 14(0.25,1.375) 15(-0.25,1.375) 16(-0.75,1.375)
  rrect1% 1.8x1.8 smd paste-5 mask-5: 17(0,0)
  silkscreen extent -1.65,-1.65 1.65,1.65, body extent -1.5,-1.5 1.5,1.5
"SMA THT connector" [mm]
  round 2.28 hole 1.52: 1(0,0) 2(-2.54,-2.54) 2(-2.54,2.54) 2(2.54,-2.54) 2(2.54,2.54)
  silkscreen extent -3.17,-3.17 3.17,3.17, body extent -3.17,-3.17 3.17,3.17, height 10
SOD-523 [mil]
  rect 20x14 smd paste+0 mask+0: 1(-31.5,0) 2(31.5,0)
  silkscreen extent -59,-30 49,30, body extent -34,-17 34,17, height 18
"TCXO 2.0x1.6mm" [mm] "SMD 2.0x1.6mm for TCXO or VCTCXO"
  rect 0.6x0.8 smd mask+0.05: 1(-0.9,-0.6) 2(0.9,-0.6) 3(0.9,0.6) 4(-0.9,0.6)
  silkscreen extent -1.05,-1.45 -0.75,-1.15, body extent -1,-0.8 1,0.8, height 1
UDFN4_1x1mm [mm] "UDFN4_1x1mm"
  rect 0.3x0.2 smd paste-0.025 mask+0.025: 1(-0.325,-0.55) 2(0.325,-0.55) 3(0.325,0.55) 4(-0.325,0.55)
  rect 0.58x0.58 smd rot 45 paste-0.025 mask+0.025: 5(0,0)
  Top Layer - RF region: 0.175,-0.65 0.175,-0.42 0.375,-0.22 0.475,-0.22 0.475,-0.65
  Top Layer - RF region: -0.175,0.65 -0.175,0.42 -0.375,0.22 -0.475,0.22 -0.475,0.65
  Top Layer - RF region: -0.175,-0.65 -0.175,-0.42 -0.445,-0.15 -0.475,-0.15 -0.475,-0.65
  Top Layer - RF region: 0.175,0.65 0.175,0.42 0.375,0.22 0.475,0.22 0.475,0.65
  body extent -0.5,-0.5 0.5,0.5, height 0.6
vqfn24_4x4mm [mm] "24 Leads, Body 4.0x4.0mm, Pitch 0.50mm, VQFN24"
  oval 0.8x0.3 smd mask+0.05: 1(-1.9,1.25) 2(-1.9,0.75) 3(-1.9,0.25) 4(-1.9,-0.25) 5(-1.9,-0.75) 6(-1.9,-1.25) 13(1.9,-1.25) 14(1.9,-0.75) 15(1.9,-0.25) 16(1.9,0.25) 17(1.9,0.75) 18(1.9,1.25)
  oval 0.3x0.8 smd mask+0.05: 7(-1.25,-1.9) 8(-0.75,-1.9) 9(-0.25,-1.9) 10(0.25,-1.9) 11(0.75,-1.9) 12(1.25,-1.9) 19(1.25,1.9) 20(0.75,1.9) 21(0.25,1.9) 22(-0.25,1.9) 23(-0.75,1.9) 24(-1.25,1.9)
  rrect5% 2.4x2.4 smd paste-2.5 mask+0.05: 25(0,0)
  Mechanical 15 keep-out lines w0.1: 2.5,-2.5 -2.5,-2.5 -2.5,2.5 2.5,2.5 2.5,-2.5
  silkscreen extent -3,-2.2 2.2,2.2, body extent -2,-2 2,2, height 1
vqfn68_7x7mm [mm] "VQFN68 Leads, Body 7.0x7.0mm, Pitch 0.35mm"
  rrect25% 0.85x0.23 smd paste+0 mask+0.025: 1(-3.45,2.8) 2(-3.45,2.45) 3(-3.45,2.1) 4(-3.45,1.75) 5(-3.45,1.4) 6(-3.45,1.05) 7(-3.45,0.7) 8(-3.45,0.35) 9(-3.45,0) 10(-3.45,-0.35) 11(-3.45,-0.7) 12(-3.45,-1.05) 13(-3.45,-1.4) 14(-3.45,-1.75) 15(-3.45,-2.1) 16(-3.45,-2.45) 17(-3.45,-2.8) 35(3.45,-2.8) 36(3.45,-2.45) 37(3.45,-2.1) 38(3.45,-1.75) 39(3.45,-1.4) 40(3.45,-1.05) 41(3.45,-0.7) 42(3.45,-0.35) 43(3.45,0) 44(3.45,0.35) 45(3.45,0.7) 46(3.45,1.05) 47(3.45,1.4) 48(3.45,1.75) 49(3.45,2.1) 50(3.45,2.45) 51(3.45,2.8)
  rrect25% 0.23x0.85 smd paste+0 mask+0.025: 18(-2.8,-3.45) 19(-2.45,-3.45) 20(-2.1,-3.45) 21(-1.75,-3.45) 22(-1.4,-3.45) 23(-1.05,-3.45) 24(-0.7,-3.45) 25(-0.35,-3.45) 26(0,-3.45) 27(0.35,-3.45) 28(0.7,-3.45) 29(1.05,-3.45) 30(1.4,-3.45) 31(1.75,-3.45) 32(2.1,-3.45) 33(2.45,-3.45) 34(2.8,-3.45) 52(2.8,3.45) 53(2.45,3.45) 54(2.1,3.45) 55(1.75,3.45) 56(1.4,3.45) 57(1.05,3.45) 58(0.7,3.45) 59(0.35,3.45) 60(0,3.45) 61(-0.35,3.45) 62(-0.7,3.45) 63(-1.05,3.45) 64(-1.4,3.45) 65(-1.75,3.45) 66(-2.1,3.45) 67(-2.45,3.45) 68(-2.8,3.45)
  rrect2% 5.55x5.55 smd paste-6.6 mask+0.025: 69(0,0)
  silkscreen extent -4.05,-3.65 3.65,3.65, body extent -3.5,-3.5 3.5,3.5, height 0.9
WSON-6 [mm] "WSON, 6-Leads, Body 2x2mm, Pitch 0.65mm, Thermal Pad 1.6x1mm, TI Recommended"
  rrect33% 0.45x0.3 smd mask+0.05: 1(-0.975,0.65) 2(-0.975,0) 3(-0.975,-0.65) 4(0.975,-0.65) 5(0.975,0) 6(0.975,0.65)
  rrect10% 1x1.6 smd paste-0.05 mask+0.05: 7(0,0)
  silkscreen extent -1.65,-1.2 1.05,1.2, body extent -1.05,-1.05 1.05,1.05, height 0.81
XDFN6_1.2X1.2mm [mm] "6 Leads, Body 1.2x1.2mm, pitch 0.40mm, XDFN6"
  rrect20% 0.37x0.24 smd paste+0 mask+0.05: 1(-0.515,0.4) 2(-0.515,0) 3(-0.515,-0.4) 4(0.515,-0.4) 5(0.515,0) 6(0.515,0.4)
  rrect5% 0.4x1.08 smd paste-0.025 mask+0.05: 7(0,0)
  body extent -0.6,-0.6 0.6,0.6, height 0.45

## Part data
C1A C1B C2A C2B C3A C3B C4A C4B C5A C5B C6A C6B C7A C7B C8A C8B C9A C9B C10A C10B C11A C11B C12A C12B C13A C13B C14A C14B C15A C15B C16A C16B C17A C17B C18A C18B C19A C19B C20A C20B C21A C21B C21C C21D C22A C22B C22C C22D C23A C23B C23C C23D C24A C24B C24C C24D C25A C25B C25C C25D C26A C26B C26C C26D C27A C27B C28A C28B C29A C29B C30A C30B C31A C31B C32A C32B C33A C33B C34A C34B C35A C35B C36A C36B C37A C37B C38A C38B C39A C39B C40A C40B C41A C41B C42A C42B C43A C43B C44A C44B C45A C45B C46A C46B C47A C47B C48A C48B C49A C49B C50A C50B C51A C51B C52A C52B C53A C53B C54A C54B C55A C55B C56A C56B C57A C57B C58A C58B C59A C59B C60A C60B: library part Cap, "Capacitor", ComponentLink1Description=Datasheet, ComponentLink2Description=SupplierLink
  C18A C18B: MPN=GRM0335C1H100FA01
  C19A C19B: MPN=GRM0335C1H2R7WA01D
  C20A C20B: MPN=GJM0335C1H2R1BB01
  C22A C22B C22C C22D C24A C24B C24C C24D: MPN=GJM0335C1H3R6WB01
  C28A C28B: MPN=GJM0335C1H2R4WB01
  C30A C30B: MPN=GJM0335C1H1R8WB01
CN1: library part CONN_8P, "Connector Generic 8 Vias", ComponentLink1Description=Datasheet, ComponentLink2Description=SupplierLink
CN2: library part CN_PowerJack, "CONN PWR JACK 2.5X5.5MM SOLDER", Manufacturer="CUI Devices", MPN=PJ-002B, Package="Barrel jack connector", ComponentLink1Description=Datasheet, ComponentLink2Description=SupplierLink, ComponentLink2URL=https://www.digikey.com/en/products/detail/cui-devices/PJ-002B/96965, Price (USD)=0.71, Supplier=Digikey
D1A D1B: library part "D Schottky", "DIODE SCHOTTKY 30V 200MA SOD523", Manufacturer=onsemi, Package=SOD-523, ComponentLink1Description=Datasheet, ComponentLink1URL=https://www.onsemi.com/pdf/datasheet/bat54xv2t1-d.pdf, ComponentLink2Description=SupplierLink, ComponentLink2URL=https://www.digikey.com/en/products/detail/onsemi/BAT54XV2T1G/918321, MPN=BAT54XV2T1G, Price (USD)=0.26, Supplier=Digikey
D2A D2B D3A D3B D4A D4B: library part LED, "LED", Manufacturer=kingbright, Package="0402  [1005]", ComponentLink1Description=Datasheet, ComponentLink2Description=SupplierLink, MPN=APHHS1005SURCK, Price (USD)=0.5, Supplier=Digikey
  D2A D2B: ComponentLink1URL=https://www.kingbrightusa.com/images/catalog/SPEC/APHHS1005SURCK.pdf, ComponentLink2URL=https://www.digikey.com/en/products/detail/kingbright/APHHS1005SURCK/1747502
D5A D5B: library part TVSdiode, "LXES Series - ESD Protection Device - Ultra Low Capacitance", Manufacturer="Murata Electronics", Package=0402, ComponentLink1Description=Datasheet, ComponentLink2Description=SupplierLink, MPN=LXES15AAA1-153, Price (USD)=.25, Supplier=Digikey
F1A F1B F2A F2B F3A F3B F4A F4B F5A F5B: library part "Ferrite beads", "Ferrite bead 10 ohm 1A", Manufacturer="Murata Electronics", Package=0402, ComponentLink1Description=Datasheet, ComponentLink2Description=SupplierLink, MPN=BLM15PG100SN1D, Price (USD)=0.1, Supplier=Digikey
  F5A F5B: ComponentLink1URL=https://www.murata.com/en-us/products/productdata/8796740059166/ENFA0018.pdf, ComponentLink2URL=https://www.digikey.com/en/products/detail/murata-electronics/BLM15PG100SN1D/2587980?s=N4IgTCBcDaIEIBkCyBGArABQOIoAy4GUA5FAERAF0BfIA
J1: library part SMA, "SMA 50 Ohm military grade THT connector", Manufacturer="TE Connectivity Aerospace, Defense and Marine", MPN=1053374-1, ComponentLink1Description=Datasheet, ComponentLink1URL=https://www.te.com/commerce/DocumentDelivery/DDEController?Action=srchrtrv&DocNm=1053374&DocType=Customer+Drawing&DocLang=English, ComponentLink2Description=SupplierLink, ComponentLink2URL=https://www.digikey.com/en/products/detail/te-connectivity-aerospace-defense-and-marine/1053374-1/1131391, Package=SMA, Price (USD)=56, Supplier=Digikey
L1A L1B L2A L2B L3A L3B L4A L4B L4C L4D L6A L6B L8A L8B L9A L9B L10A L10B L11A L11B L12A L12B L13A L13B: library part IND, "Inductor", ComponentLink1Description=Datasheet, ComponentLink2Description=SupplierLink
  L1A L1B: MPN=LQW15AN47NJ00D
  L2A L2B: MPN=LQW15AN2N5C00D
  L3A L3B: MPN=LQW15AN4N7C00
  L4A L4B L4C L4D: MPN=LQW15AN12NH00D
  L6A L6B: MPN=LQW15AN15NH00D
L5A L5B L5C L5D L7A L7B: library part IND, "FIXED IND 15UH 250MA 950MOHM SMD", Manufacturer="TDK Corporation", MPN=MLZ2012M150WT000, Package=0805, ComponentLink1Description=Datasheet, ComponentLink2Description=SupplierLink, Price (USD)=0.13, Supplier=Digikey
  L7A L7B: ComponentLink1URL=N/C, ComponentLink2URL=https://www.digikey.com/en/products/detail/tdk-corporation/MLZ2012M150WT000/2465154
L14A L14B: library part IND, "FIXED IND 2.2UH 1A 150 MOHM", Manufacturer="Murata Electronics", Package=1008, ComponentLink1Description=Datasheet, ComponentLink1URL=https://search.murata.co.jp/Ceramy/image/img/P02/JELF243B-0016.pdf, ComponentLink2Description=SupplierLink, ComponentLink2URL=https://www.digikey.com/en/products/detail/murata-electronics/LQM2HPN2R2MJ0L/2594611?s=N4IgTCBcDaIDIEUCyYASAFAcmASmJAUgAxwgC6AvkA, MPN=LQM2HPN2R2MJ0L, Price (USD)=0.24, Supplier=Digikey
NT13A NT13B NT15A NT15B NT16A NT16B NT16C NT16D NT17A NT17B: library part NTIE, "NET_TIE", ComponentLink1Description=Datasheet, ComponentLink2Description=SupplierLink
R1A R1B R2A R2B R3A R3B R4A R4B R5A R5B R6A R6B R7A R7B R10A R10B R10C R10D R11A R11B R12A R12B R13A R13B R14A R14B R15A R15B: library part Res, "Resistor", ComponentLink1Description=Datasheet, ComponentLink2Description=SupplierLink
U1A U1B: library part SX1302, "LoRa Core™ Digital Baseband Chip for LoRaWAN network gateways", Manufacturer=Semtech, Package="QFN 7x7mm P=0.35mm", ComponentLink1Description=Datasheet, ComponentLink1URL=https://media.digikey.com/pdf/Data%20Sheets/Semtech%20PDFs/SX1302_rev1.1_Jan2020.pdf, ComponentLink2Description=SupplierLink, ComponentLink2URL=https://www.digikey.com/en/products/detail/SX1302IMLTRT/600-SX1302IMLTRTCT-ND/10379524?WT.z_cid=ref_netcomponents_dkc_buynow&utm_source=netcomponents&utm_medium=aggregator&utm_campaign=buynow, MPN=SX1302, Price (USD)=37.75, Supplier=Digikey
U2A U2B: library part TCXO, "32MHz TCXO - Clipped Sinewave Output", Manufacturer="NDK America", MPN="NT2016SA 32MHz END4263A", Package=4-SMD, ComponentLink1Description=Datasheet, ComponentLink1URL=https://media.digikey.com/pdf/Data%20Sheets/NDK%20PDFs/NT2016SA-32M-END4263A.pdf, ComponentLink2Description=SupplierLink, ComponentLink2URL=https://www.digikey.com/en/products/detail/ndk-america-inc/NT2016SA-32M-END4263A/8275433, Price (USD)=1, Supplier=Digikey
U3A U3B U3C U3D: "SX1250 - Ultra low power RF Front-End", Manufacturer=Semtech, MPN=SX1250IMLTRT, Package=24-VFQFN, ComponentLink1Description=Datasheet, ComponentLink1URL=https://semtech.my.salesforce.com/sfc/p/#E0000000JelG/a/2R000000HTAF/wqCYqYPC0Z5rgGvER7_RtmlGeQhc31idv6bvSW4c_FQ, ComponentLink2Description=SupplierLink, ComponentLink2URL=https://www.digikey.com/en/products/detail/semtech-corporation/SX1250IMLTRT/10379521?s=N4IgTCBcDaIM4A8CMYCsAGEBdAvkA, Price (USD)=10, Supplier=Digikey
U4A U4B: library part SX126x, "SX1261/2 - Ultra low power RF transceiver", Manufacturer=Semtech, MPN=SX1261IMLTRT, Package=24-VFQFN, ComponentLink1Description=Datasheet, ComponentLink1URL=https://semtech.my.salesforce.com/sfc/p/E0000000JelG/a/2R000000HT7B/4cQ1B3JG0iKRo9DGRkjVuxclfwB.3tfSUcGr.S_dPd4, ComponentLink2Description=SupplierLink, ComponentLink2URL=https://www.digikey.com/en/products/detail/semtech-corporation/SX1261IMLTRT/8564368?s=N4IgTCBcDaIM4A8CMYBsSQF0C%2BQ, Price (USD)=8, Supplier=Digikey
U5A U5B U7A U7B U8A U8B: Manufacturer=Qualcomm, MPN=B39921B4344P810, Package="QCS5P 1.4x1.1mm", ComponentLink1Description=Datasheet, ComponentLink2Description=SupplierLink, Price (USD)=1.82, Supplier=Digikey
U6A U6B: "SKY66423-11 - 860 to 930MHz Front-End Module", Manufacturer="Skyworks Solutions", Package="MCM-16 3x3mm", ComponentLink1Description=Datasheet, ComponentLink1URL=https://www.skyworksinc.com/-/media/SkyWorks/Documents/Products/2801-2900/SKY66423_11_204566J.pdf, ComponentLink2Description=SupplierLink, ComponentLink2URL=https://www.digikey.com/en/products/detail/skyworks-solutions-inc/SKY66423-11/9603432, MPN=SKY66423-11, Price (USD)=3, Supplier=Digikey
U9A U9B: library part NCP114, "LDO IC Positive Fixed 1 Output 300mA 4-UDFN (1.0x1.0)", Manufacturer=onsemi, MPN=NCP114AMX330TBG, Package=4UDFN, ComponentLink1Description=Datasheet, ComponentLink1URL=https://www.onsemi.com/pdf/datasheet/ncp114-d.pdf, ComponentLink2Description=SupplierLink, ComponentLink2URL=https://www.digikey.com/en/products/detail/onsemi/NCP114AMX330TBG/6166731?s=N4IgTCBcDaIHIGEAKBGFAWAggWQBoGZ8AGAFQCEBxEAXQF8g, Price (USD)=0.48, Supplier=Digikey
U10A U10B: library part NCP103, "LDO IC Positive Fixed 1 Output 150mA 4-UDFN", Manufacturer=onsemi, MPN=NCP103AMX300TCG, Package="4-UDFN (1.0x1.0)", ComponentLink1Description=Datasheet, ComponentLink1URL=https://www.onsemi.com/pdf/datasheet/ncp103-d.pdf, ComponentLink2Description=SupplierLink, ComponentLink2URL=https://www.digikey.com/en/products/detail/onsemi/NCP103AMX300TCG/5022525?s=N4IgTCBcDaIHIGEAKBGADAZgIIFkAaGaaAKggOIgC6AvkA, Price (USD)=0.07, Supplier=Digikey
U11A U11B: library part TPS62242DRV, "Switching Regulator IC Positive Fixed 1.2V 1 Output 300mA 6-WDFN", Manufacturer="Texas Instruments", MPN=TPS62242DRVT, Package="6-WDFN Exposed Pad", ComponentLink1Description=Datasheet, ComponentLink1URL=https://www.ti.com/lit/ds/symlink/tps62242.pdf?HQS=dis-dk-null-digikeymode-dsf-pf-null-wwe&ts=1656025395113, ComponentLink2Description=SupplierLink, ComponentLink2URL=https://www.digikey.com/en/products/detail/texas-instruments/TPS62242DRVT/1739884, Price (USD)=1.66, Supplier=Digikey
U12A U12B: library part NCP176BMX330TCG, "LDO IC Positive Fixed 1 Output 500mA 6-XDFN (1.2x1.2)", Manufacturer=onsemi, Package="6-XDFN (1.2x1.2)", ComponentLink1Description=Datasheet, ComponentLink1URL=https://www.onsemi.com/pdf/datasheet/ncp176-d.pdf, ComponentLink2Description=SupplierLink, ComponentLink2URL=https://www.digikey.com/en/products/detail/onsemi/NCP176BMX330TCG/5817227?s=N4IgTCBcDaIHIGEAKBGA7ANgEIFkAaAzAQAwAqCA4iALoC%2BQA, MPN=NCP176BMX330TCG, Price (USD)=0.47, Supplier=Digikey

## Free pads (board coordinates)
  round 250 hole 125 unplated: ""(200,200) ""(200,3350) ""(3575.2,350) ""(3575.2,3250)

## Via types
v1: diameter 15.75, hole 7.87, Top Layer - RF to Bottom Layer - Digital, tented both sides, 154 vias
v2: diameter 19.68, hole 9.84, Top Layer - RF to Bottom Layer - Digital, tented top, 114 vias
v3: diameter 23.62, hole 11.81, Top Layer - RF to Bottom Layer - Digital, tented top, 102 vias
v4: diameter 15.75, hole 7.87, Top Layer - RF to Bottom Layer - Digital, 8 vias
v5: diameter 15.75, hole 7.87, Top Layer - RF to Bottom Layer - Digital, tented top, 4 vias

## Nets (pads, with @x,y where several pads share a name; then routed paths per layer and width w, separated by ;. In a path a pad name is that pad's centre, name@x,y a point inside that pad or via, vN(x,y) a via of type N, cw(c..) or ccw(c..) an arc to the next point about the centre after c; other vN are vias at no path point)
CONFIG_OKA: R4A.2 U1A.66 | length 596.4
  Top Layer - RF w8: v4(810,2989.21) 811.02,2988.19 894.26,2988.19 931.1,2951.35 U1A.66@931.1,2911.42 ; v1(810,3172.2) 947.8,3172.2 964.57,3188.98 964.57,3218.5 954.72,3228.35 R4A.2@923.23,3228.35
  Bottom Layer - Digital w8: v4@809.83,2989.38 v4(810,2989.21)
  Bottom Layer - Digital w10: v4(810,2989.21) v1(810,3172.2)